# Altium PCB power.PcbDoc
Units mil, origin at the board's own origin, x right, y up, seen from the top; angles counter-clockwise.
Board outline 1945 x 1475 mil, 2 copper layers (Top Layer, Bottom Layer); 57 components, 59 nets, 203 pads, 449 vias.
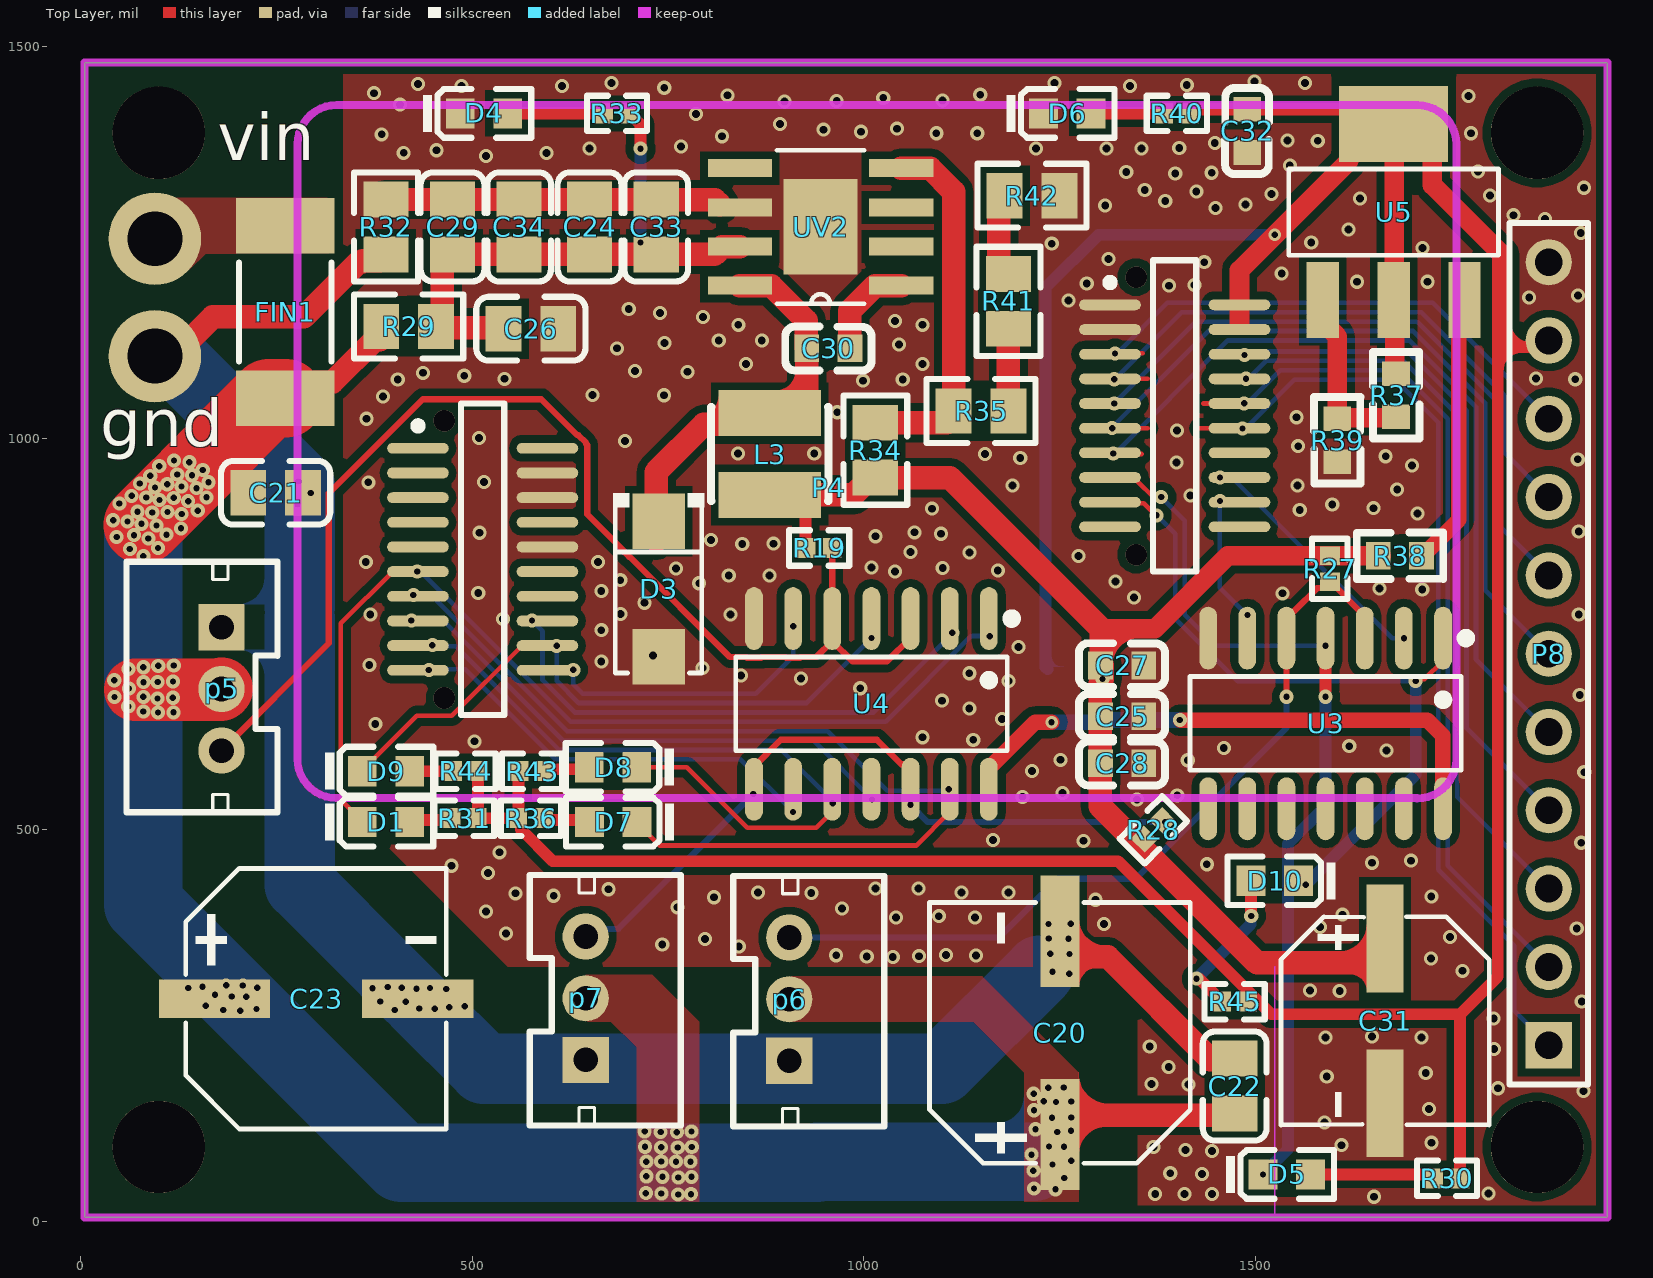
[diagram p0: Top Layer view]
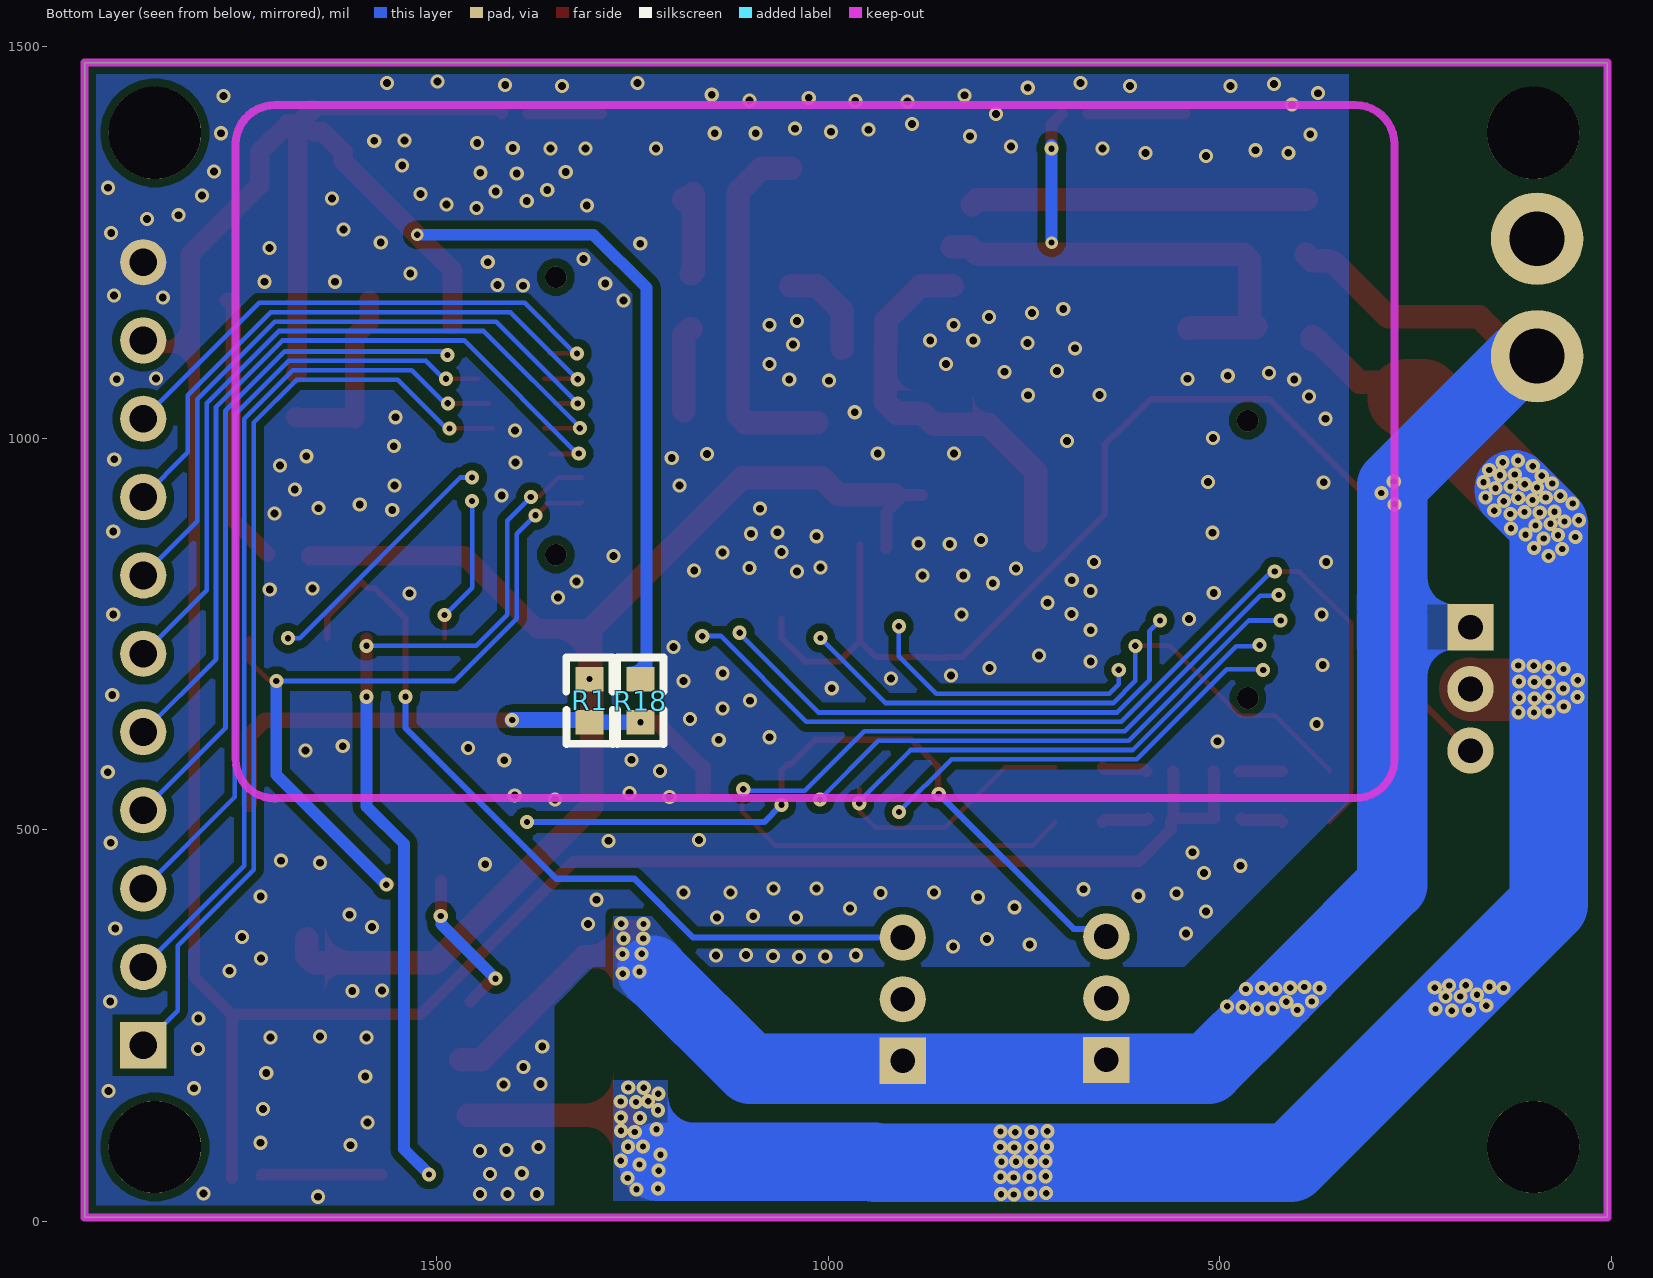
[diagram p1: Bottom Layer view, seen from below]

## Layer stack, top to bottom
Top Solder: solder mask 0.4, Solder Resist, Dk 3.5
Top Layer: signal copper 1.4
Dielectric1: dielectric 12.6, FR-4, Dk 4.8
Bottom Layer: signal copper 1.4
Bottom Solder: solder mask 0.4, Solder Resist, Dk 3.5

## Board outline
5,5 5,1480 1950,1480 1950,5

## Design rules (kind name [scope] priority, off if disabled: settings)
Clearance [All] p1: gap=6 ignorepadtopadclearanceinfootprint=FALSE except(10: Arc-Poly Track-Poly SMDPad-Poly THPad-Poly Via-Poly Fill-Poly Poly-Poly)
ComponentClearance [All] p1: gap=0 collisioncheckmode=3 verticalgap=0 showdistances=FALSE
DiffPairsRouting [All] p1: maxlimit=9 minlimit=9 mostfreqgap=9 toplayer_minwidth=4 toplayer_maxwidth=4 toplayer_prefwidth=4 bottomlayer_minwidth=4 bottomlayer_maxwidth=4 bottomlayer_prefwidth=4 maxuncoupledlength=500
FanoutControl Fanout_BGA [All] p1: bgadir=Out bgaviamode=Centered fanoutstyle=Auto fanoutdirection=Alternating viagrid=1 // Fanout_BGA (Default Rule)
HoleSize [All] p1: absolutevalues=TRUE maxlimit=10000 minlimit=8 maxpercent=80.000 minpercent=20.000
MinimumSolderMaskSliver [All] p1 off: minsoldermaskwidth=2
PlaneClearance [All] p1: clearance=8
PlaneConnect [All] p1: planeconnectstyle=Direct reliefexpansion=20 reliefentries=4 reliefconductorwidth=10 reliefairgap=10
PolygonConnect [All] p1: connectstyle=Direct reliefconductorwidth=10 reliefentries=4 polygonreliefangle="90 Angle" airgapwidth=10
RoutingVias [All] p1: holewidth=8 width=16 viastyle="Through Hole" minholewidth=6 minwidth=12 maxholewidth=28 maxwidth=50
SilkToSilkClearance [All] p1: silktosilkclearance=0
SilkToSolderMaskClearance [IsPad] p1: minsilkscreentomaskgap=0 clearancetoexposedcopper=TRUE
SolderMaskExpansion [All] p1: expansion=3 istentingtop=FALSE
Width [All] p1: maxlimit=10000 minlimit=6 preferedwidth=6
21 further rules are at their usual default settings.

## Components (designator, comment, footprint, x,y, rotation, side; value= is the part's Value field where it differs from the comment)
C20 "470UF" CAP-SMD_BD8.0-L8.3-W8.3-LS9.0-FD 1245,290 r270 top
C21 "4.7uF (475) 10% 25V" LC-0805_C 249.1,930.54 r0 top
C22 "100nF(104) 10% 50V" LC-0805_C 1473.85,172.83 r90 top
C23 "470UF" CAP-SMD_BD8.0-L8.3-W8.3-LS9.0-FD 350,290 r180 top locked
C24 "100nF(104) 10% 50V" LC-0805_C 650,1270 r270 top
C25 "0.01u" C0603 1330,645 r0 top
C26 "100nF(104) 10% 50V" LC-0805_C 575.04,1140 r180 top
C27 "0.01u" C0603 1330,710 r0 top
C28 "0.01u" C0603 1330,585 r180 top
C29 "100nF(104) 10% 50V" LC-0805_C 475,1270 r270 top
C30 "0.01u" C0603 955,1115 r180 top
C31 "220UF" SMD,6.3x7.7mm 1670,250 r270 top
C32 "10u" C0603 1490,1392.56 r90 top
C33 "100nF(104) 10% 50V" LC-0805_C 735,1270 r270 top
C34 "10uF (106) 10% 25V" LC-0805_C 560,1270 r90 top
D1 "蓝灯 0603" LC-0603_LED_S1 390,510 r0 top
D3 "B340AG" SMA_L4.4-W2.6-LS5.0-RD 755,800 r270 top
D4 "红灯 0603" LC-0603_LED_S1 515,1415 r0 top
D5 "绿灯 0603" LC-0603_LED_S1 1540.31,60 r0 top
D6 "红灯 0603" LC-0603_LED_S1 1260,1415 r0 top
D7 "黄灯 0603" LC-0603_LED_S1 680.32,510 r180 top
D8 "黄灯 0603" LC-0603_LED_S1 680,580 r180 top
D9 "蓝灯 0603" LC-0603_LED_S1 390,575 r0 top
D10 "绿灯 0603" LC-0603_LED_S1 1525,435 r180 top
FIN1 "7A" 2512 261.42,1161.36 r270 top locked
L3 "15uH" 电感 885,975 r0 top
P4 "Header 20X2" ESP-BORD -592.18,1009.98 r0 top locked
p5 "Header 3" PH2.0-LI-3P 180,680 r270 top locked
p6 "Header 3" PH2.0-LI-3P 905,283.74 r90 top locked
p7 "Header 3" PH2.0-LI-3P 645,285 r90 top locked
P8 "Header 11" HDR1X11 1875,225 r90 top
R1 "0" R0603 1305,665 r90 bottom
R18 "0" R0603 1240,665 r90 bottom
R19 "10KΩ (1002) ±1%" LC-0402_R 943.27,860 r0 top
R27 "10KΩ (1002) ±1%" LC-0402_R 1595.4,833.34 r90 top
R28 "10KΩ (1002) ±1%" LC-0402_R 1370,500 r225 top
R29 "0Ω (0R0) ±1%" LC-0805_R 418.94,1142.93 r0 top
R30 "3.3KΩ (3301) ±1%" LC-0402_R 1745,55 r0 top
R31 "3.3KΩ (3301) ±1%" LC-0402_R 490,515 r0 top
R32 "0Ω (0R0) ±1%" LC-0805_R 390,1270 r90 top
R33 "10KΩ (1002) ±1%" LC-0402_R 685,1415 r180 top
R34 "10KΩ (1002) ±1%" LC-0805_R 1015,985 r90 top
R35 "33Ω (33R0) ±1%" LC-0805_R 1149.96,1035 r180 top
R36 "3.3KΩ (3301) ±1%" LC-0402_R 575,515 r180 top
R37 "TBD(NC)" R0603 1680,1055 r270 top
R38 "0" R0603 1685,850 r0 top
R39 "0" R0603 1605,997.56 r90 top
R40 "3.3KΩ (3301) ±1%" LC-0402_R 1400,1415 r180 top
R41 "2.2KΩ (2201) ±1%" LC-0805_R 1185,1175 r270 top
R42 "1KΩ (1001) ±1%" LC-0805_R 1215,1310 r180 top
R43 "3.3KΩ (3301) ±1%" LC-0402_R 576.73,575 r180 top
R44 "3.3KΩ (3301) ±1%" LC-0402_R 491.73,575 r0 top
R45 "3.3KΩ (3301) ±1%" LC-0402_R 1473.85,280.53 r0 top
U3 "MC74HC126ADR2G" SOIC-14_L8.7-W3.9-P1.27-LS6.0-BL 1615,640 r270 top
U4 "MC74HC126ADR2G" SOIC-14_L8.7-W3.9-P1.27-LS6.0-BL 1035,665 r270 top
U5 "SC1117-3.3V" SOT-223_L6.5-W3.5-P2.30-LS7.0-BR 1695,1270 r270 top
UV2 "TPS5430_DDA_8" DDA8_3P1X2P4 945,1270 r180 top value=Value

## Footprints (in the part's own frame and the unit in brackets; to place one, negate y for a bottom-side part, rotate by r counter-clockwise, add the part's x,y. Pads: shape width x height; smd on the part's side, far side on the other; paste and mask are expansions set on the pad)
2512 [mm]
  rect 1.8x3.2 smd: 1(-2.8,0) 2(2.8,0)
  silkscreen extent -1.6,-1.5 1.6,1.5
C0603 [mm]
  rect 0.8x0.9 smd: 1(-0.7,0) 2(0.7,0)
  silkscreen extent -1.4,-0.7 1.4,0.72
CAP-SMD_BD8.0-L8.3-W8.3-LS9.0-FD [mm]
  rect 3.61x1.26 smd: 1(4.545,0.143) 2(-2.045,0.143)
  silkscreen extent -2.98,-4.08 5.48,4.37
DDA8_3P1X2P4 [mil]
  rect 82x23 smd: 1(-103,75) 2(-103,25) 3(-103,-25) 4(-103,-75) 5(103,-75) 6(103,-25) 7(103,25) 8(103,75)
  rect 94.49x122.05 smd paste-60.52: EPAD(0,0)
  silkscreen extent -56,-98 56,98, body extent -122,-98 122,98, height 66
ESP-BORD [mm]
  oval 2x0.35 smd: 1(52.633,4.077) 2(52.633,3.277) 3(52.633,2.477) 4(52.633,1.677) 5(52.633,0.877) 6(52.633,0.077) 7(52.633,-0.723) 8(52.633,-1.523) 9(52.633,-2.323) 10(52.633,-3.123) 11(48.433,-3.123) 12(48.433,-2.323) 13(48.433,-1.523) 14(48.433,-0.723) 15(48.433,0.077) 16(48.433,0.877) 17(48.433,1.677) 18(48.433,2.477) 19(48.433,3.277) 20(48.433,4.077) 21(25.985,-7.775) 22(25.985,-6.975) 23(25.985,-6.175) 24(25.985,-5.375) 25(25.985,-4.575) 26(25.985,-3.775) 27(25.985,-2.975) 28(25.985,-2.175) 29(25.985,-1.375) 30(25.985,-0.575) 31(30.185,-0.575) 32(30.185,-1.375) 33(30.185,-2.175) 34(30.185,-2.975) 35(30.185,-3.775) 36(30.185,-4.575) 37(30.185,-5.375) 38(30.185,-6.175) 39(30.185,-6.975) 40(30.185,-7.775)
  Keep-Out Layer lines w0.254: 22.074,-10.652 ccw(c23.344,-10.652) 23.344,-11.922 58.395,-11.922 ; 22.077,-10.652 22.077,9.29 ; 22.079,9.29 cw(c23.349,9.29) 23.349,10.56 ; 23.349,10.557 58.399,10.557 ; 58.395,-11.934 ccw(c58.395,-10.664) 59.665,-10.664 ; 58.399,10.556 cw(c58.399,9.286) 59.669,9.286 ; 59.669,-10.664 59.669,9.271
  silkscreen extent 25.86,-9.23 51.23,5.53, body extent 25.58,-9.14 52.99,5.41, height 6
HDR1X11 [mm] "Connector; Header; 11 Position"
  rect 1.5x1.5 hole 0.9: 1(0,0)
  round 1.5 hole 0.9: 2(2.54,0) 3(5.08,0) 4(7.62,0) 5(10.16,0) 6(12.7,0) 7(15.24,0) 8(17.78,0) 9(20.32,0) 10(22.86,0) 11(25.4,0)
  silkscreen extent -1.27,-1.27 26.67,1.27
LC-0402_R [mm]
  rect 0.6x0.65 smd mask+0.051: 1(-0.425,0) 2(0.425,0)
  silkscreen extent -0.97,-0.58 0.97,0.58, body extent -0.57,-0.27 0.58,0.28, height 0.41
LC-0603_LED_S1 [mm]
  rect 0.93x0.98 smd: A(0.77,0) K(-0.77,0)
  silkscreen extent -1.97,-0.79 1.54,0.79, body extent -0.8,-0.4 0.8,0.4, height 0.6
LC-0805_C [mm]
  rect 1.16x1.47 smd: 1(-0.89,0) 2(0.89,0)
  silkscreen extent -1.77,-1.04 1.77,1.04, body extent -1,-0.62 1,0.63, height 0.77
LC-0805_R [mm]
  rect 1.16x1.47 smd: 1(-0.89,0) 2(0.89,0)
  silkscreen extent -1.77,-1.04 1.77,1.03, body extent -1,-0.62 1,0.63, height 0.49
PH2.0-LI-3P [mm]
  rect 1.5x1.5 hole 0.8: 1(-2,0)
  round 1.5 hole 0.8: 2(0,0) 3(2,0)
  silkscreen extent -4.13,-3.08 4,1.82, body extent -3.95,-3 3.95,1.7, height 6.01
R0603 [mm]
  rect 0.8x0.9 smd: 1(-0.7,0) 2(0.7,0)
  silkscreen extent -1.4,-0.75 1.4,0.76
SMA_L4.4-W2.6-LS5.0-RD [mm] "B340A"
  rect 1.8x1.7 smd: 1(-2.387,-0.428) 2(1.998,-0.428)
  silkscreen extent -3.3,-1.9 2.53,1.05
SMD,6.3x7.7mm [mm]
  rect 3.5x1.2 smd: 1(-2.822,-0.104) 2(2.518,-0.104)
  silkscreen extent -3.53,-3.48 3.22,3.27
SOIC-14_L8.7-W3.9-P1.27-LS6.0-BL [mil] "74h126"
  oval 80.24x22.6 smd: 1(-104.88,124.98) 2(-104.88,74.98) 3(-104.88,24.98) 4(-104.88,-25.02) 5(-104.88,-75.02) 6(-104.88,-125.02) 7(-104.88,-175.02) 8(113.15,-175.02) 9(113.15,-125.02) 10(113.15,-75.02) 11(113.15,-25.02) 12(113.15,24.98) 13(113.15,74.98) 14(113.15,124.98)
  silkscreen extent -111,-198 64,160
SOT-223_L6.5-W3.5-P2.30-LS7.0-BR [mm]
  rect 2.465x1.05 smd: 1(2.375,-2.76) 2(2.375,-0.46) 3(2.375,1.84)
  rect 2.465x3.54 smd: 4(-3.34,-0.46)
  silkscreen extent -1.88,-3.86 0.91,2.94
电感 [mm]
  rect 3.32x1.5 smd: 1(-0.127,1.455) 2(-0.127,-1.201)
  silkscreen extent -2.03,-1.4 1.78,1.65

## Part data
C20 C23 C31: library part C_RB-470UF/25V_5X10
C21: library part "0805 4.7uF (475) 10% 25V", "贴片电容", Package=0805, SuppliersPartNumber=C1779, ComponentLink1Description=供应商链接, ComponentLink1URL=http://www.szlcsc.com/product/details_2131.html, Supplier=LC
C22 C24 C26 C29 C33: library part "0805 100nF(104) 10% 50V", "贴片电容", Package=0805, SuppliersPartNumber=C49678, ComponentLink1Description=供应商链接, ComponentLink1URL=http://www.szlcsc.com/product/details_50686.html, Supplier=LC
C25 C27 C28 C30 C32: library part CAP_0805
C34: library part "0805 10uF (106) 10% 25V", "贴片电容", Package=0805, SuppliersPartNumber=C15850, ComponentLink1Description=供应商链接, ComponentLink1URL=http://www.szlcsc.com/product/details_16532.html, Supplier=LC
D1 D9: library part "0603 蓝灯", "发光二极管", Package=0603, SuppliersPartNumber=C72041, ComponentLink1Description=供应商链接, ComponentLink1URL=http://www.szlcsc.com/product/details_73150.html, Supplier=LC
D3: BOM_JLCPCB Part Class="Extended Part", BOM_Manufacturer=Shikues, BOM_Manufacturer Part=B340AG, BOM_Supplier=LCSC, BOM_Supplier Part=C433997, Contributor=LCSC, spicePre=D, spiceSymbolName=B340AG
D4 D6: library part "0603 红灯", "发光二极管", Package=0603, SuppliersPartNumber=C2286, ComponentLink1Description=供应商链接, ComponentLink1URL=http://www.szlcsc.com/product/details_2659.html, Supplier=LC
D5 D10: library part "0603 绿灯", "发光二极管", Package=0603, SuppliersPartNumber=C72043, ComponentLink1Description=供应商链接, ComponentLink1URL=http://www.szlcsc.com/product/details_73152.html, Supplier=LC
D7 D8: library part "0603 黄灯", "发光二极管", Package=0603, SuppliersPartNumber=C72038, ComponentLink1Description=供应商链接, ComponentLink1URL=http://www.szlcsc.com/product/details_73147.html, Supplier=LC
FIN1: library part Fuse
L3: BOM_JLCPCB Part Class="Extended Part", BOM_Manufacturer=CENKER, BOM_Manufacturer Part=CKCS3012-15uH/M, BOM_Supplier=LCSC, BOM_Supplier Part=C354559, Contributor=LCSC, nameAlias=Inductance, spicePre=L, spiceSymbolName=CKCS3012-15UH/M
P4: "Header, 20-Pin, Dual row", LatestRevisionDate=17-Jul-2002, LatestRevisionNote="Re-released for DXP Platform.", Publisher="Altium Limited"
p5 p6 p7: "Header, 3-Pin", LatestRevisionDate=17-Jul-2002, LatestRevisionNote="Re-released for DXP Platform.", Publisher="Altium Limited"
P8: "Header, 11-Pin", LatestRevisionDate=17-Jul-2002, LatestRevisionNote="Re-released for DXP Platform.", Publisher="Altium Limited"
R1 R18 R37 R38 R39: library part RES_0805
R19 R27 R28 R33: library part "0402 10KΩ (1002) 1%", "贴片电阻", Package=0402, SuppliersPartNumber=C25744, ComponentLink1Description=供应商链接, ComponentLink1URL=http://www.szlcsc.com/product/details_26487.html, Supplier=LC
R29 R32: library part "0805 0Ω (0R0) 1%", "贴片电阻", Package=0805, SuppliersPartNumber=C17477, ComponentLink1Description=供应商链接, ComponentLink1URL=http://www.szlcsc.com/product/details_18165.html, Supplier=LC
R30 R31 R36 R40 R43 R44 R45: library part "0402 3.3KΩ (3301) 1%", "贴片电阻", Package=0402, SuppliersPartNumber=C25890, ComponentLink1Description=供应商链接, ComponentLink1URL=http://www.szlcsc.com/product/details_26633.html, Supplier=LC
R34: library part "0805 10KΩ (1002) 1%", "贴片电阻", Package=0805, SuppliersPartNumber=C17414, ComponentLink1Description=供应商链接, ComponentLink1URL=http://www.szlcsc.com/product/details_18102.html, Supplier=LC
R35: library part "0805 33Ω (33R0) 1%", "贴片电阻", Package=0805, SuppliersPartNumber=C17634, ComponentLink1Description=供应商链接, ComponentLink1URL=http://www.szlcsc.com/product/details_18322.html, Supplier=LC
R41: library part "0805 2.2KΩ (2201) 1%", "贴片电阻", Package=0805, SuppliersPartNumber=C17520, ComponentLink1Description=供应商链接, ComponentLink1URL=http://www.szlcsc.com/product/details_18208.html, Supplier=LC
R42: library part "0805 1KΩ (1001) 1%", "贴片电阻", Package=0805, SuppliersPartNumber=C17513, ComponentLink1Description=供应商链接, ComponentLink1URL=http://www.szlcsc.com/product/details_18201.html, Supplier=LC
U3 U4: BOM_JLCPCB Part Class="Extended Part", BOM_Manufacturer="ON Semicon", BOM_Manufacturer Part=MC74HC126ADR2G, BOM_Supplier=LCSC, BOM_Supplier Part=C233530, Contributor=LCSC, spicePre=U, spiceSymbolName=MC74HC126ADR2G
U5: BOM_JLCPCB Part Class="Extended Part", BOM_Manufacturer=FM, BOM_Manufacturer Part=SC1117-3.3V, BOM_Supplier=LCSC, BOM_Supplier Part=C173386, Contributor=LCSC, spicePre=U, spiceSymbolName=SC1117-3.3V
UV2: "Imported", Manufacturer="Texas Instruments", Manufacturer_Part_Number=tps5430_dda_8, PACKAGE_DESIGNATOR=DDA, Datasheet_URL=http://www.ti.com/lit/gpn/TPS5430, FAMILY_NAME="STEP-DOWN REGULATOR", GENERIC_PART_NUMBER=TPS5430, INDUSTRY_STD_PKG_TYPE="SO PowerPAD", PIN_COUNT=8, RefDes=RefDes, Type=Type, Vendor="Texas Instruments"

## Free pads (board coordinates)
  round 118.11 hole 118.11: 3(100,95) 3(100,1390) 3(1860,95) 3(1860,1390)
  round 118.11 hole 70: 4(95,1105) 4(95,1255)

## Via types
v1: diameter 18, hole 10, Top Layer to Bottom Layer, tented both sides, 266 vias
v2: diameter 18, hole 8, Top Layer to Bottom Layer, tented both sides, 176 vias
v3: diameter 27.56, hole 27.56, Top Layer to Bottom Layer, 4 vias
v4: diameter 16, hole 8, Top Layer to Bottom Layer, 3 vias

## Nets (pads, with @x,y where several pads share a name; then routed paths per layer and width w, separated by ;. In a path a pad name is that pad's centre, name@x,y a point inside that pad or via, vN(x,y) a via of type N, cw(c..) or ccw(c..) an arc to the next point about the centre after c; other vN are vias at no path point)
0: P4.11
1: P4.6 P8.1 | length 1200.3
  Top Layer w6: 1428.45,1012.99 P4.6
  Bottom Layer w6: v2@1487.5,1012.5 1550,1075 1679.24,1075 1734,1020.24 1734,449.03 1831,352.03 1831,269 P8.1
  other v2: 1483.86,1012.63
2: D10.K P4.12 U3.1 | length 950.1
  Top Layer w6: P4.12 1316.13,917.02 1357.65,917.02 1372.95,901.72 v2(1374.18,901.72) ; D10.K@1555.81,430.78 1563.72,430.78 v2(1564.5,430) ; v2(1705,690) 1707.3,692.3 1716.21,692.3 1739.98,716.06 U3.1
  Bottom Layer w6: v2(1374.18,901.72) 1398,877.9 1398,769.89 1477.89,690 v2(1705,690)
  Bottom Layer w15: v2(1564.5,430) 1705,570.5 v2(1705,690)
3: P4.5 P8.2 | length 1099
  Top Layer w6: 1433.64,1044.49 P4.5
  Bottom Layer w6: v2@1490,1045 1532,1087 1684.21,1087 1746,1025.21 1746,454 P8.2
  other v2: 1485.99,1044.74
3V3: C32.2 P4.1 P4.2 P8.10 R18.2 R30.2 R31.2 R36.2 R37.1 R40.1 R43.2 R44.2 R45.2 U5.2 U5.4 | length 5498
  Top Layer w15: R44.2 507.6,574.13 507.6,515.87 R31.2 R36.2 ; R43.2 559.13,574.13 559.13,515.87 562.58,512.42 562.58,500.46 603.03,460 1325,460 1520.52,264.48 1761.73,264.48 ; R40.1 1416.73,1415.8 1421.04,1420.11 C32.2 U5.4@1658.27,1420.11 ; R30.2 1761.73,264.48 ; 1809.93,329.16 1809.93,1114.22 ; 1809.93,1130.7 1809.93,1114.22 ; P8.10 1866.57,1116.57 1812.28,1116.57 1809.93,1114.22 ; 1761.73,264.48 1809.87,312.62 1809.87,1114.16 1809.93,1114.22
  Top Layer w25: P4.2@1480,1145.56 P4.1 1480,1214.57 1619.72,1354.29 1619.72,1365.45 1645.74,1391.48 U5.4@1656.91,1391.48 ; U5.4@1658.27,1420.11 U5.4 1690.43,1401.48 1726.45,1365.45 1726.45,1323.55 1815,1235 1815,1120 ; U5.4@1677.67,1391.77 1677.67,1176.48 1678.45,1175.69 1678.45,1084.1 R37.1
  Bottom Layer w15: R18.2@1235,705 1232.23,707.77 1232.23,1192.23 1300,1260 v4(1525,1260)
4: D5.K P4.13 U3.4 | length 1154.9
  Top Layer w6: P4.13 1345.02,950 1351.02,944 1368.27,926.73 1378.27,926.73 v2(1380,925) ; D5.K@1505.81,60.78 D5.K@1507.3,59.29 ; v2(1590,670) v2@1589.98,678.27
  Top Layer w15: v2@1589.98,678.27 v2(1590,735) U3.4
  Bottom Layer w6: v2(1380,925) 1410,895 1410,774.86 1449.86,735 v2(1590,735)
  Bottom Layer w15: v2(1510,60) 1542,92 1542,482 1590,530 v2(1590,670)
5: P4.4 P8.3 | length 989
  Top Layer w6: P4.4@1447.52,1075.98 P4.4
  Bottom Layer w6: v2@1492.5,1077.5 1514,1099 1689.18,1099 1758,1030.18 1758,542 P8.3
  other v2: 1488.37,1076.13
5V: C25.1 C27.1 C28.2 C31.1 L3.2 R1.2 R19.1 R27.2 R28.2 R34.1 R38.1 | length 1682.6
  Top Layer w15: L3.2 L3.2@901.21,927.72 ; L3.2@915.83,927.72 L3.2@901.21,927.72 ; R19.1 925.86,860.67 925.86,905.69 903.84,927.72 L3.2@901.21,927.72
  Top Layer w25: C27.1 C27.1@1303.19,710.75 ; 1303.19,756.81 1371.81,756.81 1465.01,850.01 1595.4,850.01 R38.1@1660.99,850.01
  Top Layer w30: L3.2@915.83,927.72 986.66,927.72 1008.9,949.96 R34.1 1110.04,949.96 1303.19,756.81 C27.1@1303.19,710.75 ; v2@1302.44,687.07 C25.1 C28.2 1302.44,529.99 1351.21,481.21 1502.43,330 1657.28,330 1665.9,338.62 C31.1 ; v2(1305,692.56) C27.1@1305,710
6: P4.14 P8.5 | length 1054.8
  Top Layer w6: P4.14 1316.13,980.01 1354.99,980.01
  Bottom Layer w6: v2@1317.91,977.91 1465,1125 1697.12,1125 1782,1040.12 1782,718 P8.5
  other v2: 1318.83,980.71
7: P4.3 P8.4 | length 865.5
  Bottom Layer w6: v2@1490,1110 1491,1111 1694.15,1111 1770,1035.15 1770,630 P8.4
  other v2: 1486.39,1106.44
8: P4.15 P8.6 | length 972.2
  Top Layer w6: P4.15 1362.99,1012.99
  Bottom Layer w6: v2@1314,1011 1440,1137 1702.09,1137 1794,1045.09 1794,806 P8.6
  other v2: 1317.46,1013.01
8V: C24.2 C26.2 C29.2 C33.2 C34.1 R29.2 R33.1 UV2.7 | length 737.9
  Top Layer w15: R33.1 701.73,1414.02 706.04,1409.7 706.21,1409.7 715,1400.92 v2(715,1370)
  Top Layer w30: C26.2 538.53,1141.47 455.44,1141.47 R29.2 461.81,1150.77 461.81,1227.13 469.65,1234.96 C34.1 C24.2 C33.2 809.46,1234.96 819.5,1245 UV2.7
  Bottom Layer w15: v4(715,1250) v2@715,1375
8VIN: C20.1 C21.1 C22.1 C23.1 FIN1.2 p5.2 p6.2 p7.2 R29.1 | length 2616.2
  Top Layer w30: FIN1.2 281.85,1071.55 321.51,1071.55 376.02,1126.06 382.13,1126.06 R29.1@382.13,1130 ; C20.1 1250.61,115.81 1250.61,125.8 1260.42,135.6 C22.1@1460,135.6
  Top Layer w80: v2@69.64,678.96 178.96,678.96 p5.2
  Top Layer w100: v2@79.48,889.35 177.68,987.56 ; v2(142.4,952.92) 240.6,1051.12 FIN1.2
  Bottom Layer w100: v2@125,935 80,890 80,405 170.49,314.51 186.35,298.65 198.97,286.03 209.79,275.21 410,75 722.52,75 741.43,75 760.34,75 778.96,75 940,75 941.15,76.15 1217.19,76.15
  other v2: 763.17,34.4 779.68,34.78 721.89,36.05 741.7,35.54 1245.09,40.92 1217.56,42.03 1256.37,55.38 763.42,55.99 743.1,56.88 780.06,56.88 722.52,57.64 1216.77,64.76 1241.09,72.54 722.52,76.27 760.34,76.27 778.96,76.27 741.58,76.56 1265.08,77.42 1214.5,85.19 762.58,94.43 720.73,95.33 741.43,94.58 780.45,95.03 1255.96,95.36 1236.68,95.57 740.81,114.17 761.49,113.96 1247.24,114.23 720.34,115.11 780.2,114.79 1264.92,115.81 1219.36,117.61 1240.44,132.21 1265.08,132.53 1217.56,141.95 1245.8,152.43 1230.16,153.42 1265.11,153.07 1217.19,162.99 1235.78,170.65 1255.54,171.01 203.75,269.17 182.03,269.99 224.58,271.33 159.82,275.46 192.95,287.23 211.67,287.03 171.77,289.48 137.65,298.17 225.64,298.44 155.6,299.63 185.91,301.49 207.19,301.27 98.88,649.8 118.65,650.05 80.12,651.29 60.91,657.69 98.29,667.67 117.81,668.76 43.34,669.76 80.12,669.91 61.65,680.48 80.42,688.67 98.44,688.82 118.02,689.44 43.04,691.05 61.21,705.35 80.12,707.73 99.18,709.52 118.96,709.91 80.18,849.54 62.89,858.81 98.76,860.12 86.53,872.24 46.02,874.12 68.1,876.41 109.86,877.03 128.25,885.06 97.05,888.8 77.88,890.78 59.76,893.8 41.64,895.47 129.08,903.43 91.51,905.32 72.57,906.3 111.13,905.84 149.65,907.71 49.51,916.86 137.42,919.83 100.71,921.29 83.83,924.39 118.99,924 160.75,924.63 65.26,926.62 147.94,936.39 95.13,937.27 128.77,938.37 110.65,941.39 75.68,942.34 163.45,943.89 88.98,952.16 123.46,953.89 156.04,959.58 100.4,964.45 138.88,969.51 119.4,971.8
9: P4.16 P8.7 | length 854
  Top Layer w6: P4.16 P4.16@1348.49,1044.49
  Bottom Layer w6: v2@1322.5,1047.5 1424,1149 1707.06,1149 1806,1050.06 1806,894 P8.7
  other v2: 1320.05,1044.38
10: P4.17 P8.8 | length 779.3
  Top Layer w6: P4.17 1363.02,1075.98
  Bottom Layer w6: v2@1320.14,1075.14 1406,1161 1712.03,1161 1818,1055.03 1818,982 P8.8
  other v2: 1320.05,1075.46
11: P4.18 P8.9 | length 680.4
  Top Layer w6: P4.18 1315.76,1108.59 1356.49,1108.59
  Bottom Layer w6: v2@1324.48,1109.48 1388,1173 1727,1173 P8.9
  other v2: 1321.12,1108.51
12: P4.30
13: P4.29
14: P4.28
15: P4.27
16: P4.26
17: P4.31
18: D1.K P4.25 U4.1 | length 1247.1
  Top Layer w6: D1.K 359.69,510.98 333,537.67 333,551.36 332.38,551.98 332.38,763.85 398.37,829.84 P4.25
  Bottom Layer w6: v2(430,830) 433.25,830 437.84,825.41 438.87,825.41 542.91,721.37 626.28,638 1028,638 1137.69,747.69 1160.65,747.69 v2(1161.05,747.29)
21: D7.K P4.24 U4.13 | length 1248.3
  Top Layer w6: D7.K 710.63,509.02 739.65,480 1066.95,480 1109.98,523.03 U4.13 U4.13@1108.76,551.85
  Bottom Layer w6: v2(425,800) 425.93,799.07 448.24,799.07 621.31,626 954,626 1030,550 1106.84,550 v2(1108.72,551.88)
26: P4.34
33: P4.38 U4.2 | length 665.1
  Bottom Layer w6: v2(576.43,767.36) 590,753.79 590,691.25 631.25,650 1012.91,650 1113.35,750.44 v2(1113.35,751.72)
34: D9.K P4.39 U4.4 | length 796.4
  Top Layer w6: D9.K 359.69,575.98 429.34,645.64 474.01,645.64 563.72,735.35 P4.39
  Bottom Layer w6: v2(608,735) 608,690.22 636.22,662 927,662 v2(1010,745)
35: P4.40 U4.6 | length 362.2
  Bottom Layer w6: v2(629.14,704.37) 629.14,686.04 641.19,674 862.17,674 910,721.83 v2(910,760)
36: P4.23 U4.11 | length 683.4
  Bottom Layer w6: v2(422.42,767.49) 462.85,767.49 616.34,614 936.1,614 1010.67,539.43 v2(1010.67,538.77)
37: D8.K P4.22 U4.10 | length 933.4
  Top Layer w6: D8.K 774.3,580 851.57,502.73 939.68,502.73 959.98,523.03 U4.10 960.61,551.22 v2(960.61,534)
  Bottom Layer w6: v2(449.25,735.85) 450.66,734.44 478.92,734.44 611.36,602 895.07,602 960.61,536.46 v2(960.61,534)
38: P4.21 U4.9 | length 540.9
  Bottom Layer w6: v2(444.75,704.22) 445.54,705 491.39,705 606.39,590 842.72,590 v2(909.85,522.87)
45: P4.7
46: P4.10
74VCC: R1.1 R18.1 U3.14 U4.14 | length 718.5
  Top Layer w20: U4.14 1159.98,579.97 1161.18,581.17 1162.74,581.17 1219.02,637.44 v4(1240,637.44) ; v2@1405,640 1720,640 1739.48,620.52 U3.14@1739.48,533.12
  Bottom Layer w20: v4(1240,637.44) R1.1 ; R1.1@1312.19,640.3 v2(1403.84,640.3)
AGND: C20.2 C21.2 C22.2 C23.2 p5.1 p6.1 p7.1 pad.4@95,1105 R32.1 | length 2491.1
  Top Layer w30: pad.4@95,1105 118.84,1105 168.84,1155 285,1155 355,1225 358.49,1225 360.62,1227.13 382.17,1227.13 R32.1 ; C20.2 1250.61,361.37 1250.61,351.18 1260.42,341.37 1260.42,337.98 1311.64,337.98 1442.98,206.64 1455.28,206.64 C22.2@1469.22,206.64
  Bottom Layer w90: pad.4@95,1105 98.47,1101.53 118.47,1101.53 280,940 280,785 ; 280,770 280,430 392.48,317.52 420.37,289.63 435.42,274.58 515,195 875,195 1100,195 1225,320
  other v2: 401.1,270.06 432.62,271.77 452.45,271.59 470.89,273.42 490.7,274.69 415.23,280.38 382.56,280.68 429.07,297.03 466.91,296.73 372.84,297.89 410.1,298.37 446.21,297.91 392.12,299.44 1262.66,316.35 1241.1,318.92 1262.97,341.34 1238.43,341.66 1236.49,361.37 1261.8,361.05 1236.17,379.9 1264.49,380.22 276.98,915.76 293.78,930.3 277.95,944.85
CAN_H: P4.36
CAN_L: P4.37
GND: C24.1 C25.2 C26.1 C27.2 C28.1 C29.1 C31.2 C32.1 C33.1 C34.2 D3.2 D4.K D6.K P4.19 P4.20 P4.32 P4.33 P4.35 P8.11 R32.2 R39.1 R42.1 U3.7 U4.7 UV2.6 UV2.EPAD | length 428.7
  Top Layer w30: R32.2 C29.1 C34.2 C24.1 C33.1 735.45,1304.59 809.91,1304.59 UV2.6@816,1298.5
  other v1: 1651.87,31.44 1372.35,35.1 1410,35 1445,35 1798.2,35.41 1391.64,61.42 1431.99,60.61 1445,90 1411,91.21 1370,95 1610.46,97.33 1725.18,100.46 1588.53,126.16 1722.05,143.48 1919.48,166.46 1810,170 1367.71,175.5 1415,175 1591.42,185.2 1717.88,189.63 1389.62,197.13 1805,220 1365.47,223.51 1590,235 1712.41,235 1649.31,236.05 1804.67,259.08 1917.14,280.87 1607.96,294.27 1570,295 1765,320 1724.71,335.85 1037.28,337.45 1003.98,338.44 1070.84,338.69 964.95,339.94 1105,340 1143.66,339.69 840.6,351.15 742.78,353.61 797.25,360.55 1748.71,363.33 543.21,367.6 1910.74,374.21 1582.86,376.01 1306.83,379.83 1041.46,387.95 1142.34,388.26 1096.04,389.79 1611.38,391.71 517.71,395.92 972.41,399.59 762.1,401.14 1296.01,410.74 808.74,413.96 1725,415 604.18,415.85 555.41,418.96 865,420 933.21,419.53 1125,420 1185,420 674.1,424.13 1015,425 1070,425 520.21,445.11 473.86,454.19 1438.28,456.09 1649.27,458.04 1698.92,460.63 535.19,471.36 1916.5,483.53 1280.7,486.03 1165.07,486.94 1349.27,538.93 1202.93,542.22 1400.58,544.13 1253.91,547.12 1920.33,573.68 1215,575 1251.6,589.45 1413.94,588.88 1667.85,601.36 1460,604.4 1620.16,606.86 503.15,613.11 1140,615 1075.07,618.27 376.4,635.05 1176.6,641.64 1135,655 1100,665 1914.58,672.13 995.69,680.87 1185,690 920.14,693.5 843.21,697.12 1135,700 794.2,706.68 368.73,710.49 665,715 731.05,722.88 1197.96,733.57 665,755 539.25,769.22 370,775 830,775 1913.3,775.06 689.64,775.71 720,790 1345.3,796.61 1534.77,802.09 507.87,802.52 665,805 1713.48,807.11 1658.91,808.24 790,815 1321.48,817.32 689.15,818.87 827.79,824.83 880,825 1040,830 1171.36,831.39 760.5,833.93 1010,835 1100.97,834.61 364.25,842.19 660.92,841.93 1274.51,849.71 1135.27,854.08 1060,855 845,865 884.87,865.47 805,870 1015,875 1098.83,878.2 509.57,879.41 1065,880 1913.3,881.19 1707.52,904.13 1557.04,908.52 1087.39,910.19 1651.25,910.84 1598.47,915.34 1417.23,926.85 1681.43,934.79 1190,940 1553.94,940.01 367.45,943.84 515.27,944.34 1700.36,965.46 1399.46,969.25 1912.02,973.25 1200,975 1666.74,977.17 1155,980 839.76,980.76 936.91,980.76 1555,990 695.16,996.43 508.64,1000.3 1400.2,1009.92 365,1025 1552.91,1026.99 966.32,1033.33 386.07,1053.42 653.81,1055.44 745,1055 999.27,1073.64 405,1075 1050,1075 541.55,1076.04 1858.85,1076.33 1908.83,1075.54 490,1080 437.36,1083.71 775,1085 707.91,1086.15 850,1095 1075,1095 685,1115 1045,1120 745.66,1121.92 815,1125 870,1125 840,1145 1075,1145 1040,1150 795,1155 740,1160 700,1165 1261.51,1176.07 1850,1180 1912.27,1182.32 1390,1195 1422.65,1196.06 1285,1197.71 1630,1200 1720,1200 1533.93,1210.48 1435,1225 1312.82,1229.03 1713.84,1243.04 1240.28,1248.61 1571.64,1250.05 1915.94,1262.24 1619.22,1266.69 1870,1280 1830,1285 1449.22,1294.06 1308.51,1297.38 1487.52,1298.66 1385.26,1303.05 1633.96,1306.27 1800,1310 1520.76,1312.08 1424.87,1315.28 1359.02,1317.2 1920,1320 1398.02,1338.29 1444.53,1339.16 1335.36,1340.21 1784.56,1340.94 1544.31,1348.43 517.54,1360.43 595.01,1364.36 412.6,1364.68 454.6,1367.9 650,1370 1220,1370 1310,1370 1355,1370 1403.13,1370.9 766.71,1372.89 1448.52,1377.29 1541.3,1380.37 1580,1380 819.01,1385.81 384.52,1388.29 1092.82,1389.68 1145.13,1389.68 1775.87,1389.61 996.6,1391.62 948.81,1394.2 1042.45,1395.5 893.28,1401.31 786.08,1414.22 407.99,1426.11 899.09,1430.37 965.6,1431.01 1100.57,1431.66 1025.01,1434.89 1772.65,1437.39 826.12,1438.12 1149,1438.76 374.7,1440.82 745.39,1447.8 486.57,1450.01 615,1450 1340,1450 1412.75,1451.47 431.02,1452.51 677.86,1453.77 1243.61,1453.74 1563.55,1453.8 1499.12,1455.79
Net2_2: FIN1.1 pad.4@95,1255 | length 3.9
  Top Layer w100: pad.4@95,1255 pad.4@97.74,1257.74
NetC30_1: C30.1 UV2.1 | length 126.7
  Top Layer w30: C30.1 982.56,1162.98 1014.58,1195 UV2.1
NetC30_2: C30.2 D3.1 L3.1 UV2.8 | length 523.7
  Top Layer w30: D3.1@735,870 735,956.97 795.79,1017.76 865.47,1017.76 L3.1 912.91,1032.28 927.44,1046.81 C30.2 926.69,1115.75 926.69,1150.34 882.03,1195 UV2.8
NetD1_A: D1.A R31.1 | length 55
  Top Layer w15: D1.A 422.82,512.5 470.77,512.5 R31.1
NetD4_A: D4.A R33.2 | length 123
  Top Layer w15: D4.A R33.2
NetD5_A: D5.A R30.1 | length 159.7
  Top Layer w6: R30.1@1723.27,60 R30.1
  Top Layer w15: D5.A R30.1@1723.27,60
NetD6_A: D6.A R40.2 | length 93
  Top Layer w15: D6.A R40.2
NetD7_A: D7.A R36.1 | length 60.3
  Top Layer w15: R36.1 594.23,512.5 647.5,512.5 D7.A
NetD8_A: D8.A R43.1 | length 58.3
  Top Layer w15: R43.1 595.96,577.5 647.18,577.5 D8.A
NetD9_A: D9.A R44.1 | length 54.7
  Top Layer w15: D9.A R44.1
NetD10_A: D10.A R45.1 | length 199
  Top Layer w15: v2(1425,310) 1425.57,309.43 1429.21,309.43 1452.8,285.83 1452.8,284.85 R45.1 ; D10.A 1494.84,434.84 1494.84,390.16 v2(1495,390)
  Bottom Layer w15: v2(1425,310) 1494.43,379.43 1494.43,389.43 v2(1495,390)
NetR34_2: R34.2 R35.2 UV2.4 | length 463
  Top Layer w30: R34.2 1106.06,1020.04 R35.2@1114.92,1028.9 ; UV2.4 1085,1345 1114.92,1315.08 R35.2
NetR35_1: R35.1 R41.2 | length 110.4
  Top Layer w30: R41.2@1175,1139.96 1177.17,1139.96 1185,1132.13 R35.1
NetR37_2: R37.2 R39.2 U5.1 | length 235
  Top Layer w25: U5.1 1586.36,1148.62 1605,1129.98 R39.2 1606.16,1026.28 1678.84,1026.28 R37.2
NetR38_2: R38.2 U5.3 | length 345.8
  Top Layer w20: R38.2@1716.11,851.98 1760,895.87 1760,1169.02 U5.3
NetR41_1: R41.1 R42.2 | length 107
  Top Layer w30: R42.2@1172.48,1312.48 1172.48,1212.56 R41.1@1175,1210.04 ; R42.2@1182.44,1307.48 R42.2@1184.96,1304.96
U0R: P4.9 U3.6 | length 189.7
  Top Layer w6: U3.6 1489.99,774.27 v2(1490.11,774.39)
  Bottom Layer w6: v2(1455,920) 1455,809.51 v2(1490.11,774.39)
U0T: P4.8 U3.2 | length 329.2
  Top Layer w6: U3.2@1685.79,745.66 U3.2@1687.28,744.18
  Bottom Layer w6: v2(1455,950) 1470,950 1675.12,744.88 1684.86,744.88 1689.98,750 v2@1695,750
  other v2: 1689.98,744.88
UART0: p6.3 R27.1 U3.3 U3.5 | length 1051.2
  Top Layer w8: v2(1540,670) U3.5 ; U3.5 1539.98,769.75 1550.39,780.16 1550.47,780.16 1579.11,808.8 1588.57,808.8 1596.38,816.61 1639.98,773.01 U3.3
  Bottom Layer w8: p6.3 1172.48,362.48 1247.59,437.59 1347.59,437.59 1540,630 v2(1540,670)
UART1: p7.3 R28.1 U4.8 U4.12 | length 921.3
  Top Layer w8: v2(859.04,545.85) 859.98,546.78 859.98,580.67 894.31,615 1016.99,615 1048.14,583.84 1052.31,583.84 1059.98,576.18 U4.12 ; U4.12@1055.81,535.78 1056.22,535.78 v2(1060,532) ; R28.1@1380.81,510.78 R28.1@1382.3,509.29
  Bottom Layer w8: p7.3 658.82,363.74 668.6,373.53 686.72,373.53 v2(859.04,545.85) ; v2(1060,532) 1082,510 v2(1385,510)
UART2: p5.3 R19.2 U4.3 U4.5 | length 1549
  Top Layer w8: p5.3 316.98,738.24 316.98,929.82 437.16,1050 588.47,1050 634.26,1004.21 635.68,1004.21 645.57,994.32 645.57,992.9 646.96,991.52 646.96,903.04 694.7,855.3 694.7,854.41 700.56,848.55 701.45,848.55 829.24,720.76 850.16,720.76 851.16,719.76 868.8,719.76 869.8,720.76 900.16,720.76 901.16,719.76 918.8,719.76 919.8,720.76 939.68,720.76 U4.5@959.98,741.06 ; R19.2@959.98,864.6 U4.5 U4.5@959.98,741.06 ; U4.3 1059.98,745.55 1029.43,715 986.04,715 U4.5@959.98,741.06
pads on no net: U3.8 U3.9 U3.10 U3.11 U3.12 U3.13 UV2.2 UV2.3 UV2.5
copper on no net:
  other v3: 464.31,668.42 1348.11,851.57 464.31,1022.75 1348.11,1205.91

## Polygon pours and split planes (outlines as drawn)
GND on Bottom Layer "GND_L02_P010" (solid, remove dead copper, pour order 10): 335.59,1475.95 335.59,535.08 545.67,325 1300,325 1350,275 1350,5 1950,5 1950,1480
AGND on Bottom Layer "AGND_L02_P008" (solid, pour order 8): 1186.55,344.97 1225,389.37 1225,390 1275,390 1275,298.99 1244.56,276.18
8VIN on Bottom Layer "8VIN_L02_P006" (solid, pour order 6): 1204.99,125.79 1204.99,179.99 1205,180 1275,180 1275,26.2 1205,26.2
AGND on Bottom Layer "AGND_L02_P000" (solid, pour order 0): 150.25,729.28 150.97,730 325,730 325,800 313.29,788.29 150.52,788.29
GND on Top Layer "GND_L01_P009" (solid, pour order 9): 335.59,1475.95 335.59,535.08 545.67,325 1300,325 1350,275 1350,5 1950,5 1950,1480
8VIN on Top Layer "8VIN_L01_P005" (solid, pour order 5): 905,255 1140,255 1205,190 1205,25 1275,25 1275,190 1151.8,313.2 904.55,313.2
Net2_2 on Top Layer "NET2_2_L01_P001" (solid, remove dead copper, pour order 1): 93.14,1313.97 99.89,1307.21 314.9,1307.21 320.15,1301.96 316.71,1298.52 316.71,1236.14 198.67,1236.14 198.49,1235.96 159.56,1235.96 135.78,1212.18
8VIN on Top Layer "8VIN_L01_P004" (solid, pour order 4): 644.32,255.15 677.02,255.15 710,222.17 710,25 790,25 790,255 730,315 710,315 645,315

## Keep-outs
Top Layer:
  lines w2: 1525,5 1525,325
Keep-Out Layer:
  lines w10: 5,5 5,20 5,1000 5,1130 5,1235 5,1480 1950,1480 1950,5 5,5

## Other copper
Top Layer:
  region net 5V: 1352.74,744.98 ccw(c1352.47,709.99) 1317.49,710.6 1317.8,744.98
  region net 5V: 1643.06,292.52 ccw(c1621.04,293.47) 1622.2,315.48 1643.06,315.48
  region net 5V: 1607.4,344.66 ccw(c1607.67,379.65) 1642.65,379.05 1642.34,344.66
  region net NetC30_2: 790.54,1031.53 ccw(c790.86,1056.36) 815.69,1055.8 815.69,1031.53
  region net NetC30_2: 887.92,1061.29 ccw(c888.24,1086.12) 913.07,1085.56 913.07,1061.29
  region net 3V3: 1826.61,1148.3 ccw(c1851.44,1147.98) 1850.88,1123.15 1826.61,1123.15
  region net 3V3: 1841.91,1109.6 ccw(c1841.59,1084.77) 1816.76,1085.33 1816.76,1109.6
  region net AGND: 1299.88,324.18 ccw(c1299.56,299.35) 1274.73,299.91 1274.73,324.18
  region net AGND: 1274.73,387.53 ccw(c1309.71,387.26) 1309.11,352.28 1274.73,352.6
  region net 8VIN: 1310.25,120.73 ccw(c1309.98,85.75) 1275,86.35 1275.31,120.73
  region net 8VIN: 1274.82,189.86 ccw(c1312.48,187.93) 1310.19,150.29 1275.31,150.01
Bottom Layer:
  region net 3V3: 1239.62,722.42 ccw(c1254.77,723.18) 1255.38,708.02 1239.62,707.79
  region net 8VIN: 1172.18,125.98 ccw(c1170.68,160.3) 1205.01,161.47 1205.42,125.98
  region net AGND: 235.17,696.88 ccw(c200.42,695.36) 199.23,730.11 235.17,730.11
  region net AGND: 202.08,788.14 ccw(c200.96,822.22) 235.04,823.01 235.31,788.14

## Silkscreen, mask and mechanical layers (free items; w line width, h text height)
Top Overlay:
  text "vin" at 175,1355 h60
  text "gnd" at 25,989.99 h60